# Altium PCB Current Sensing.PcbDoc
Units mil, origin at the board's own origin, x right, y up, seen from the top; angles counter-clockwise.
Board outline 2362.2 x 1338.58 mil, 2 copper layers (Top Layer, Bottom Layer); 26 components, 15 nets, 71 pads, 0 vias.
Unrouted connection lines stored in the file: 42.
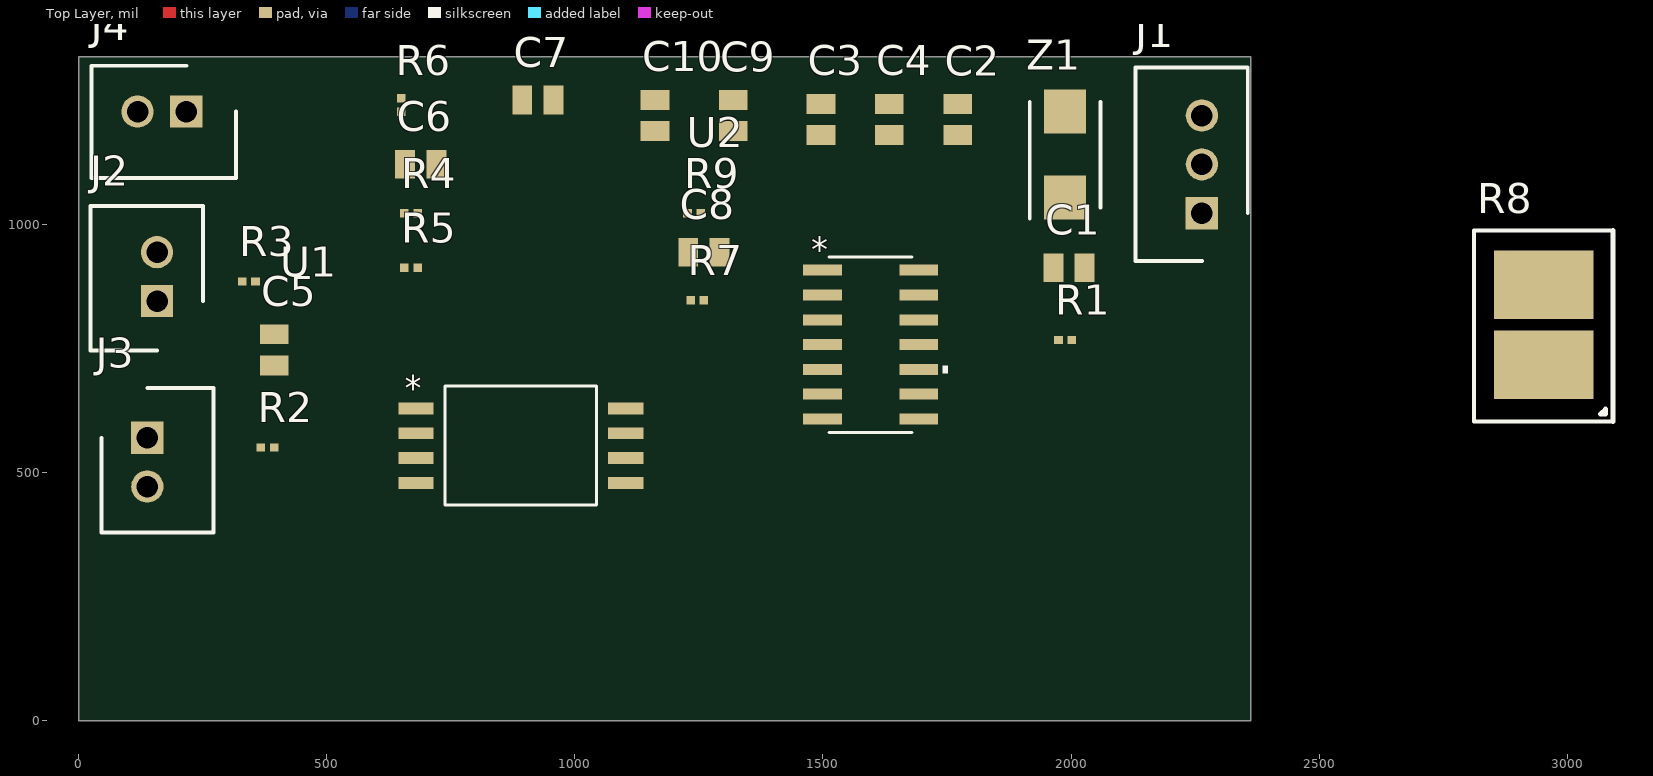
[diagram p0: Top Layer view]
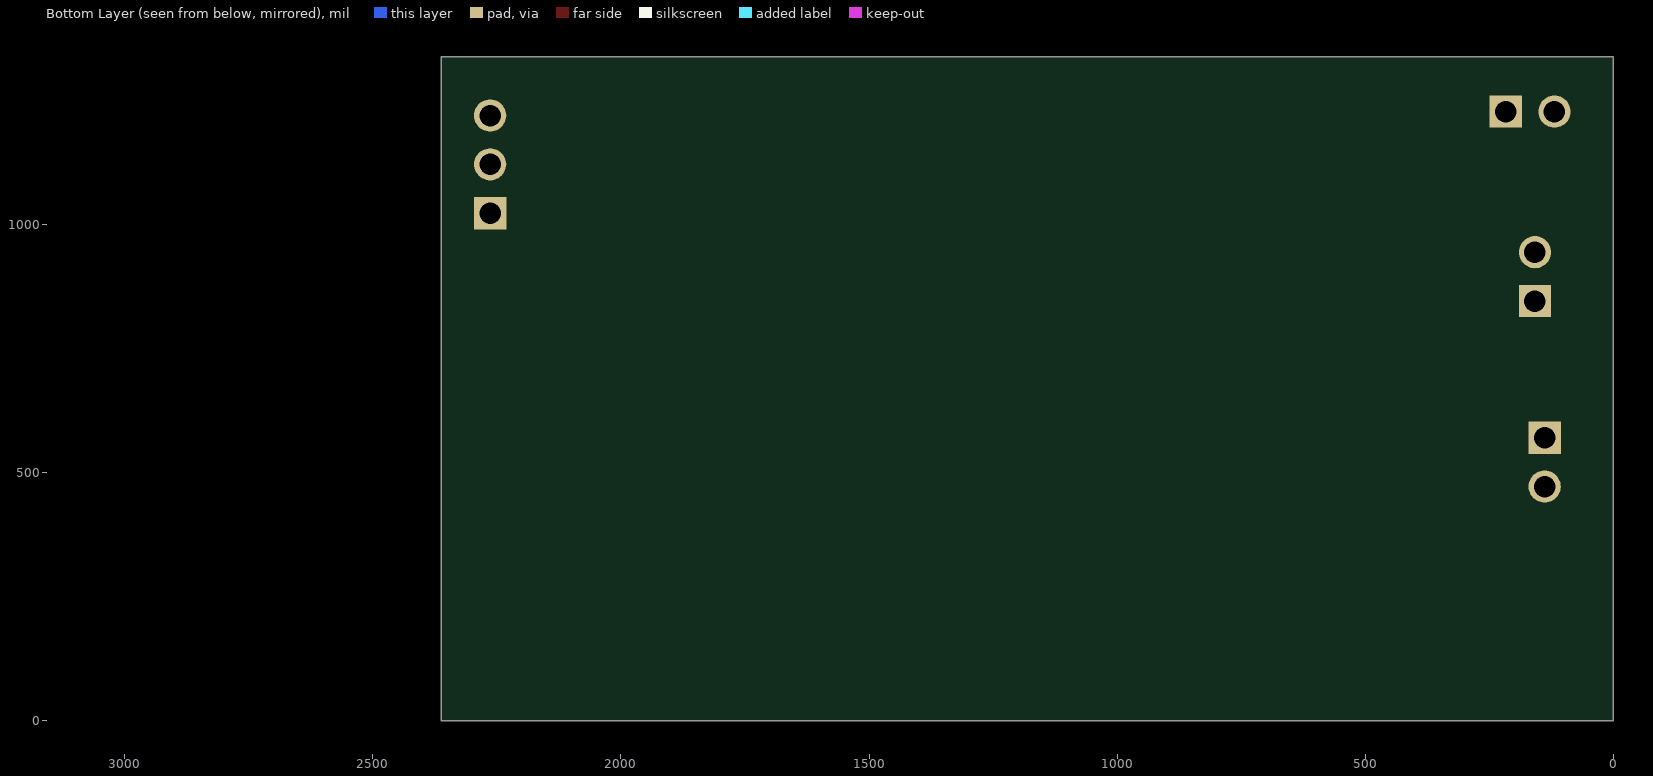
[diagram p1: Bottom Layer view, seen from below]

## Layer stack, top to bottom
Top Solder: solder mask 0.4, Solder Resist, Dk 3.5
Top Layer: signal copper 1.4
Dielectric 1: dielectric 12.6, FR-4, Dk 4.8
Bottom Layer: signal copper 1.4
Bottom Solder: solder mask 0.4, Solder Resist, Dk 3.5

## Board outline
0,1338.58 2362.2,1338.58 2362.2,0 0,0

## Design rules (kind name [scope] priority, off if disabled: settings)
Clearance [All] p1: gap=0.3 ignorepadtopadclearanceinfootprint=FALSE
PolygonConnect [All] p1: connectstyle=Relief reliefconductorwidth=10 reliefentries=4 polygonreliefangle="90 Angle" airgapwidth=10
RoomDefinition "Current Sensing" [InComponentClass('Current Sensing')] p1: confinementstyle=ConfineIn formatcopy=TRUE lockcomponents=FALSE outline -78.74,124.09 2557.44,124.09 2557.44,1346.46 -78.74,1346.46
RoutingVias [All] p1: holewidth=28 width=50 viastyle="Through Hole" minholewidth=28 minwidth=50 maxholewidth=28 maxwidth=50
SolderMaskExpansion [All] p1: expansion=4 istentingtop=FALSE
Width [All] p1: maxlimit=10 minlimit=10 preferedwidth=10
30 further rules are at their usual default settings.

## Components (designator, comment, footprint, x,y, rotation, side; value= is the part's Value field where it differs from the comment)
C1 "10 uf" CAPC2012X88N 1996.06,913.39 r0 top
C2 "0.1 uf" CAPC2012X88N 1771.65,1212.6 r90 top
C3 "0.1 uf" CAPC2012X88N 1496.06,1212.6 r90 top
C4 "2.2 uf" CAPC2012X88N 1633.86,1212.6 r90 top
C5 "0.1 uf" CAPC2012X88N 393.7,748.03 r90 top
C6 "330pF" CAPC2012X88N 688.98,1122.05 r0 top
C7 "2000pF" CAPC2012X88N 925.2,1251.97 r180 top
C8 "330 pF" CAPC2012X88N 1259.84,944.88 r0 top
C9 "0.1 uF" CAPC2012X88N 1318.9,1220.47 r270 top
C10 "0.01 uF" CAPC2012X88N 1161.42,1220.47 r270 top
J1 "B3B-XH-A(LF)(SN)" SHDR3W64P0X250_1X3_990X575X700P 2263.78,1023.62 r90 top
J2 "B2B-XH-A(LF)(SN)" SHDR2W64P0X250_1X2_740X575X700P 157.48,846.46 r90 top
J3 "B2B-XH-A(LF)(SN)" SHDR2W64P0X250_1X2_740X575X700P 137.8,570.87 r270 top
J4 "B2B-XH-A(LF)(SN)" SHDR2W64P0X250_1X2_740X575X700P 216.54,1228.35 r180 top
R1 "806" RESC0603X26N 1988.19,767.72 r180 top
R2 "0 ohm" RESC0603X26N 380.31,551.18 r0 top
R3 "0 ohm" RESC0603X26N 342.52,885.83 r0 top
R4 "681" RESC0603X26N 669.29,1023.62 r0 top
R5 "1000" RESC0603X26N 669.29,913.39 r0 top
R6 "100" RESC0603X26N 649.61,1241.73 r270 top
R7 "1000" RESC0603X26N 1246.46,848.03 r0 top
R8 "50mOhm" R_Shunt 2952.76,798.62 r90 top
R9 "681" RESC0603X26N 1240.16,1023.62 r0 top
U1 "AMC1301DWVR" DWV0008A 890.86,554.92 r0 top value=Value
U2 "TLV9064IDR" D14 1595.91,758.66 r0 top value=Value
Z1 "5.1V Vz" DIOM5436X247N 1988.19,1141.73 r90 top

## Footprints (in the part's own frame and the unit in brackets; to place one, negate y for a bottom-side part, rotate by r counter-clockwise, add the part's x,y. Pads: shape width x height; smd on the part's side, far side on the other; paste and mask are expansions set on the pad)
CAPC2012X88N [mm]
  rect 1.02x1.47 smd: 1(-0.8,0) 2(0.8,0)
  body extent -1,-0.63 1,0.63, height 0.88
D14 [mil]
  rect 78x22 smd paste+0 mask+0: 1(-97,150) 2(-97,100) 3(-97,50) 4(-97,0) 5(-97,-50) 6(-97,-100) 7(-97,-150) 8(97,-150) 9(97,-100) 10(97,-50) 11(97,0) 12(97,50) 13(97,100) 14(97,150)
  silkscreen extent -84,-177 156,177, body extent 0,0 10,10, height 10
DIOM5436X247N [mm]
  rect 2.25x2.15 smd: 1(-2.2,0) 2(2.2,0)
  silkscreen extent -3.27,-1.81 2.7,1.81, body extent -2.7,-1.81 2.7,1.81, height 2.47
DWV0008A [mil]
  rect 71x24 smd paste+0 mask+3: 1(-211.5,75) 2(-211.5,25) 3(-211.5,-25) 4(-211.5,-75) 5(211.5,-75) 6(211.5,-25) 7(211.5,25) 8(211.5,75)
  silkscreen extent -152,-120 152,120, body extent 0,0 10,10, height 10
R_Shunt [mm]
  rect 3.5x5.1 smd: 1(-2.055,0) 2(2.055,0)
  silkscreen extent -4.95,-3.56 4.83,3.56
RESC0603X26N [mm]
  rect 0.44x0.42 smd: 1(-0.34,0) 2(0.34,0)
  body extent -0.3,-0.15 0.3,0.15, height 0.26
SHDR2W64P0X250_1X2_740X575X700P [mm]
  rect 1.65x1.65 hole 1.1: 1(0,0)
  round 1.65 hole 1.1: 2(2.5,0)
  silkscreen extent -2.54,-2.35 4.86,3.4, body extent -2.45,-2.88 4.95,2.88, height 7
SHDR3W64P0X250_1X3_990X575X700P [mm]
  rect 1.65x1.65 hole 1.1: 1(0,0)
  round 1.65 hole 1.1: 2(2.5,0) 3(5,0)
  silkscreen extent -2.45,-2.35 7.45,3.4

## Part data
C1 C2 C3 C4 C5 C6 C7 C8 C9 C10: library part C0805C104K5RACTU, "Capacitor", Manufacturer_Name=Kemet, Mouser Part Number=80-C0805C104K5R, RS Part Number=2644416P, Datasheet Link=http://docs-emea.rs-online.com/webdocs/134c/0900766b8134ce68.pdf, Height=0.88mm, Manufacturer_Part_Number=C0805C104K5RACTU, Mouser Price/Stock=https://www.mouser.com/Search/Refine.aspx?Keyword=80-C0805C104K5R, RS Price/Stock=http://uk.rs-online.com/web/p/products/2644416P
J1: "Connector", Manufacturer_Name="JST (JAPAN SOLDERLESS TERMINALS)", RS Part Number=8201557P, Datasheet Link=http://docs-emea.rs-online.com/webdocs/1357/0900766b81357f2f.pdf, Height=7mm, Manufacturer_Part_Number=B3B-XH-A(LF)(SN), RS Price/Stock=http://uk.rs-online.com/web/p/products/8201557P
J2 J3 J4: "Connector", Manufacturer_Name="JST Sales America", Datasheet Link=http://www.jst-mfg.com/product/pdf/eng/eXH.pdf, Height=7mm, Manufacturer_Part_Number=B2B-XH-A(LF)(SN)
R1 R2 R3 R4 R5 R6 R7 R9: library part RC0201JR-0710RL, "Resistor", Manufacturer_Name="YAGEO (PHYCOMP)", Mouser Part Number=603-RC0201JR-0710RL, Datasheet Link=http://www.yageo.com/documents/recent/PYu-RC0201_51_RoHS_L_8.pdf, Height=0.26mm, Manufacturer_Part_Number=RC0201JR-0710RL, Mouser Price/Stock=https://www.mouser.com/Search/Refine.aspx?Keyword=603-RC0201JR-0710RL
R8: library part R_SHUNT, "50 mOhms ±1% 10W Chip Resistor", Resistance="50 mOhm"
U1 U2: "No Description Available", RefDes=RefDes, Type=DEV, Vendor="Texas Instruments"
  U1: Built_By=Texas_Instrument_Team, Copyright="Copyright (C) 2018 Accelerated Designs. All rights reserved", Manufacturer_Part_Number=AMC1301DWVR
  U2: Copyright="Copyright (C) 2016 Accelerated Designs. All rights reserved", Manufacturer_Part_Number=TLV9064IDR
Z1: library part 1SMB5918BT3G, "Zener Diode", Manufacturer_Name="ON Semiconductor", Mouser Part Number=863-1SMB5918BT3G, RS Part Number=5453314P, Allied_Number=70099466, Allied Price/Stock=https://www.alliedelec.com/on-semiconductor-1smb5918bt3g/70099466/, Datasheet Link=https://componentsearchengine.com/Datasheets/2/1SMB5918BT3G.pdf, Height=2.47mm, Manufacturer_Part_Number=1SMB5918BT3G, Mouser Price/Stock=https://www.mouser.com/Search/Refine.aspx?Keyword=863-1SMB5918BT3G, RS Price/Stock=http://uk.rs-online.com/web/p/products/5453314P

## Nets (pads, with @x,y where several pads share a name; then routed paths per layer and width w, separated by ;. In a path a pad name is that pad's centre, name@x,y a point inside that pad or via, vN(x,y) a via of type N, cw(c..) or ccw(c..) an arc to the next point about the centre after c; other vN are vias at no path point)
+5: C3.1 C4.1 C9.2 C10.2 J1.2 U1.8 U2.4
+15: J1.1 R1.1
GND: C1.2 C2.2 C3.2 C4.2 C7.1 C9.1 C10.1 J1.3 U1.4 U1.5 U2.11 Z1.2
NetC1_1: C1.1 C2.1 R1.2 U1.1 Z1.1
NetC5_1: C5.1 R2.2 U1.2
NetC5_2: C5.2 R3.2 U1.3
NetC6_1: C6.1 R4.1 R6.2 U2.1
NetC6_2: C6.2 R4.2 R5.2 U2.2
NetC7_2: C7.2 J4.1 R6.1
NetC8_1: C8.1 R9.1
NetC8_2: C8.2 R7.2 R9.2 U2.3
NetJ2_1: J2.1 R3.1
NetJ3_1: J3.1 R2.1
NetR5_1: R5.1 U1.6
NetR7_1: R7.1 U1.7
pads on no net: J2.2 J3.2 J4.2 R8.1 R8.2 U2.5 U2.6 U2.7 U2.8 U2.9 U2.10 U2.12 U2.13 U2.14

## Text inside footprints (layer, text, board x,y; h text height)
U1: Top Overlay "*" at 656.86,646.92 h50; Mechanical 13 "*" at 745.86,616.92 h50; Mechanical 7 "Default Padstyle: RX67Y22D0T" at 540.86,239.92 h50; Mechanical 7 "Pin One Padstyle: RX67Y22D0T" at 540.86,179.92 h50; Mechanical 7 "Alt 1 Padstyle: RX71Y24D0T" at 565.86,-0.08 h50; Mechanical 7 "Alt 2 Padstyle: OX90Y60D30P" at 553.36,-60.08 h50; Mechanical 7 "0.295in/7.493mm" at 797.11,764.92 h25; Mechanical 7 "0.462in/11.735mm" at 790.86,839.92 h25; Mechanical 7 "0.23in/5.842mm" at 1158.36,542.42 h25; Mechanical 7 "0.05in/1.27mm" at 396.86,592.42 h25; Mechanical 7 "0.039in/0.991mm" at 585.61,319.92 h25
U2: Top Overlay "*" at 1476.41,925.66 h50; Mechanical 13 "*" at 1519.91,877.66 h50; Mechanical 7 "0.05in/1.27mm" at 1417.66,466.66 h25; Mechanical 7 "0.05in/1.27mm" at 1216.41,871.16 h25; Mechanical 7 "0.344in/8.738mm" at 1794.41,746.16 h25; Mechanical 7 "0.244in/6.198mm" at 1502.16,1100.66 h25; Mechanical 7 "0.157in/3.988mm" at 1502.16,1025.66 h25; Mechanical 7 "Alt 2 Padstyle: OX90Y60D30P" at 1258.41,86.66 h50; Mechanical 7 "Alt 1 Padstyle: OX60Y90D30P" at 1258.41,146.66 h50; Mechanical 7 "Pin One Padstyle: RX78Y22D0T" at 1245.91,326.66 h50; Mechanical 7 "Default Padstyle: RX78Y22D0T" at 1245.91,386.66 h50